# Altium PCB projet_pcb_F103.PCBDOC
Units mil, origin at the board's own origin, x right, y up, seen from the top; angles counter-clockwise.
Board outline 3545 x 2760 mil, 2 copper layers (TopLayer, BottomLayer); 24 components, 25 nets, 112 pads, 13 vias.
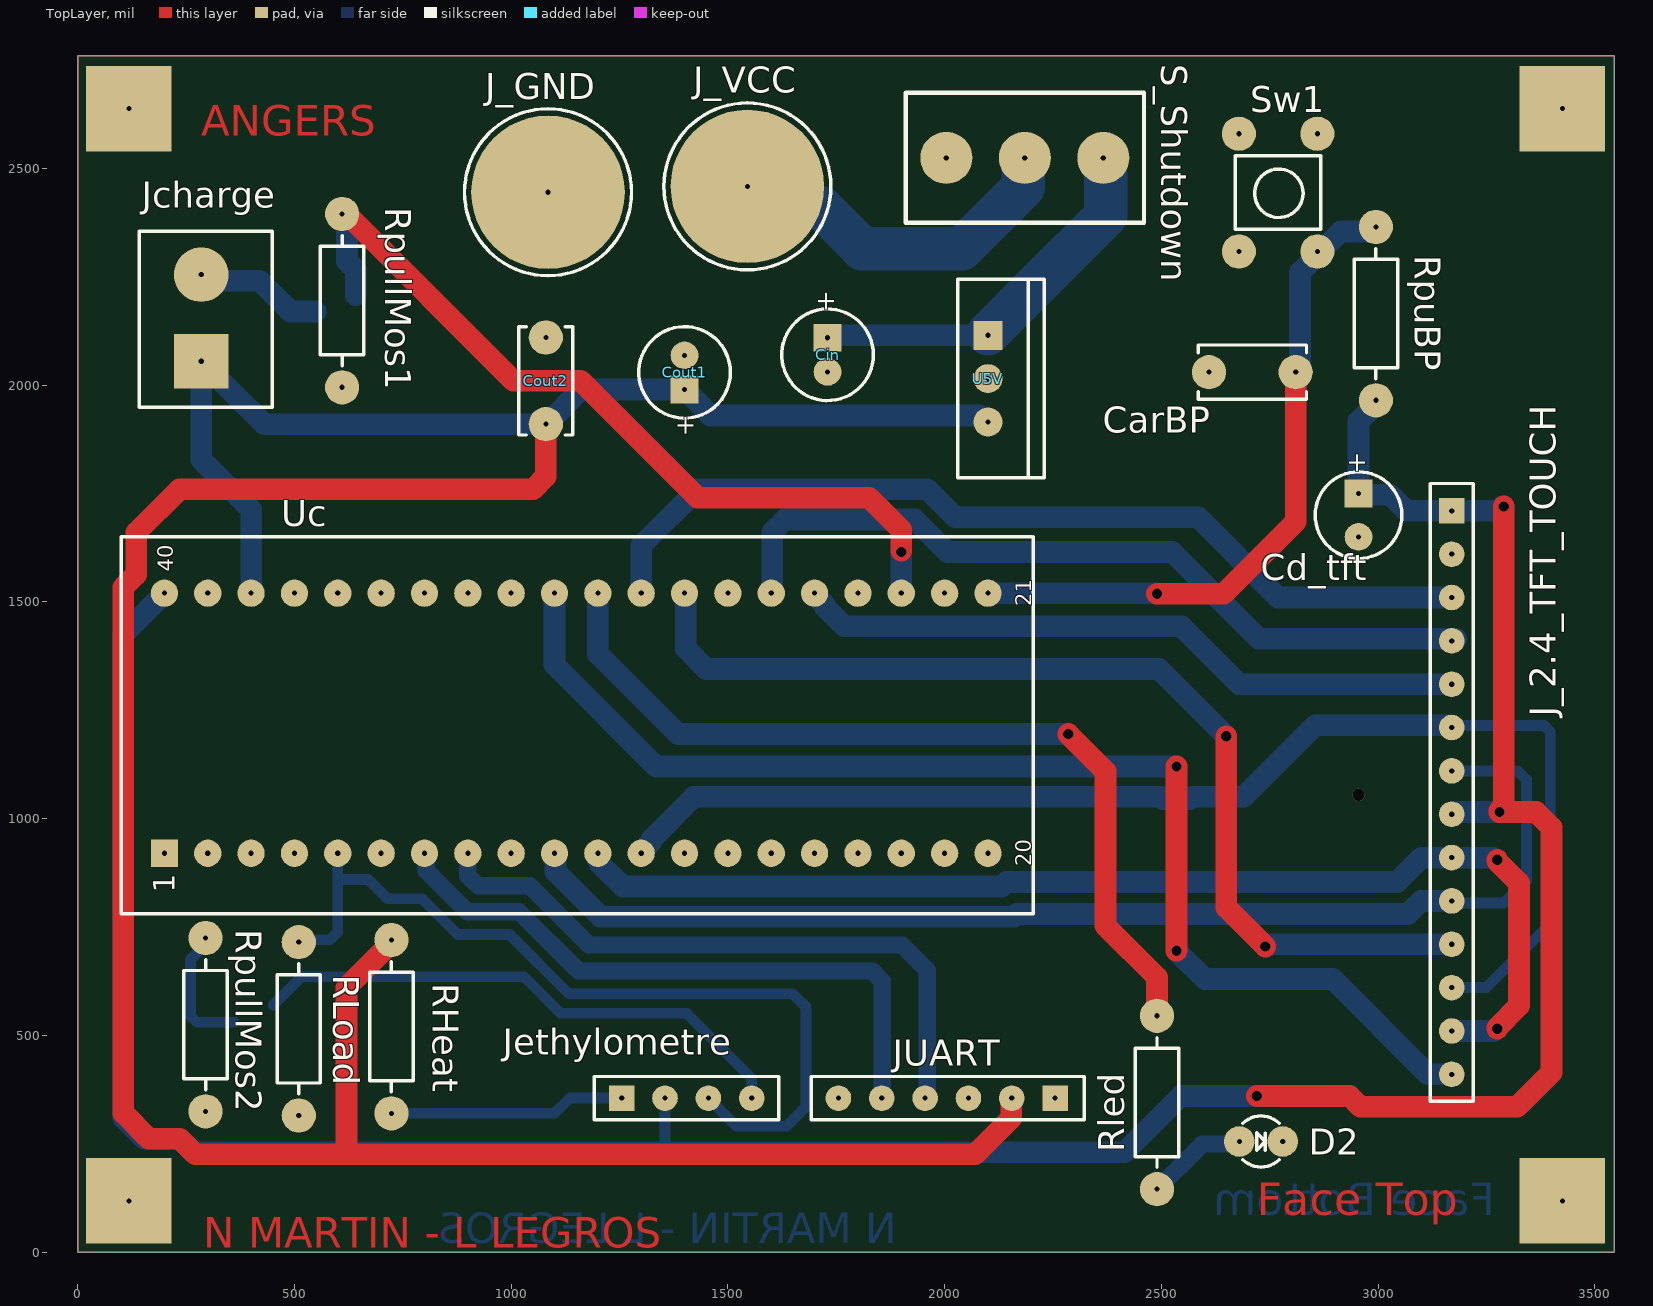
[diagram p0: TopLayer view]
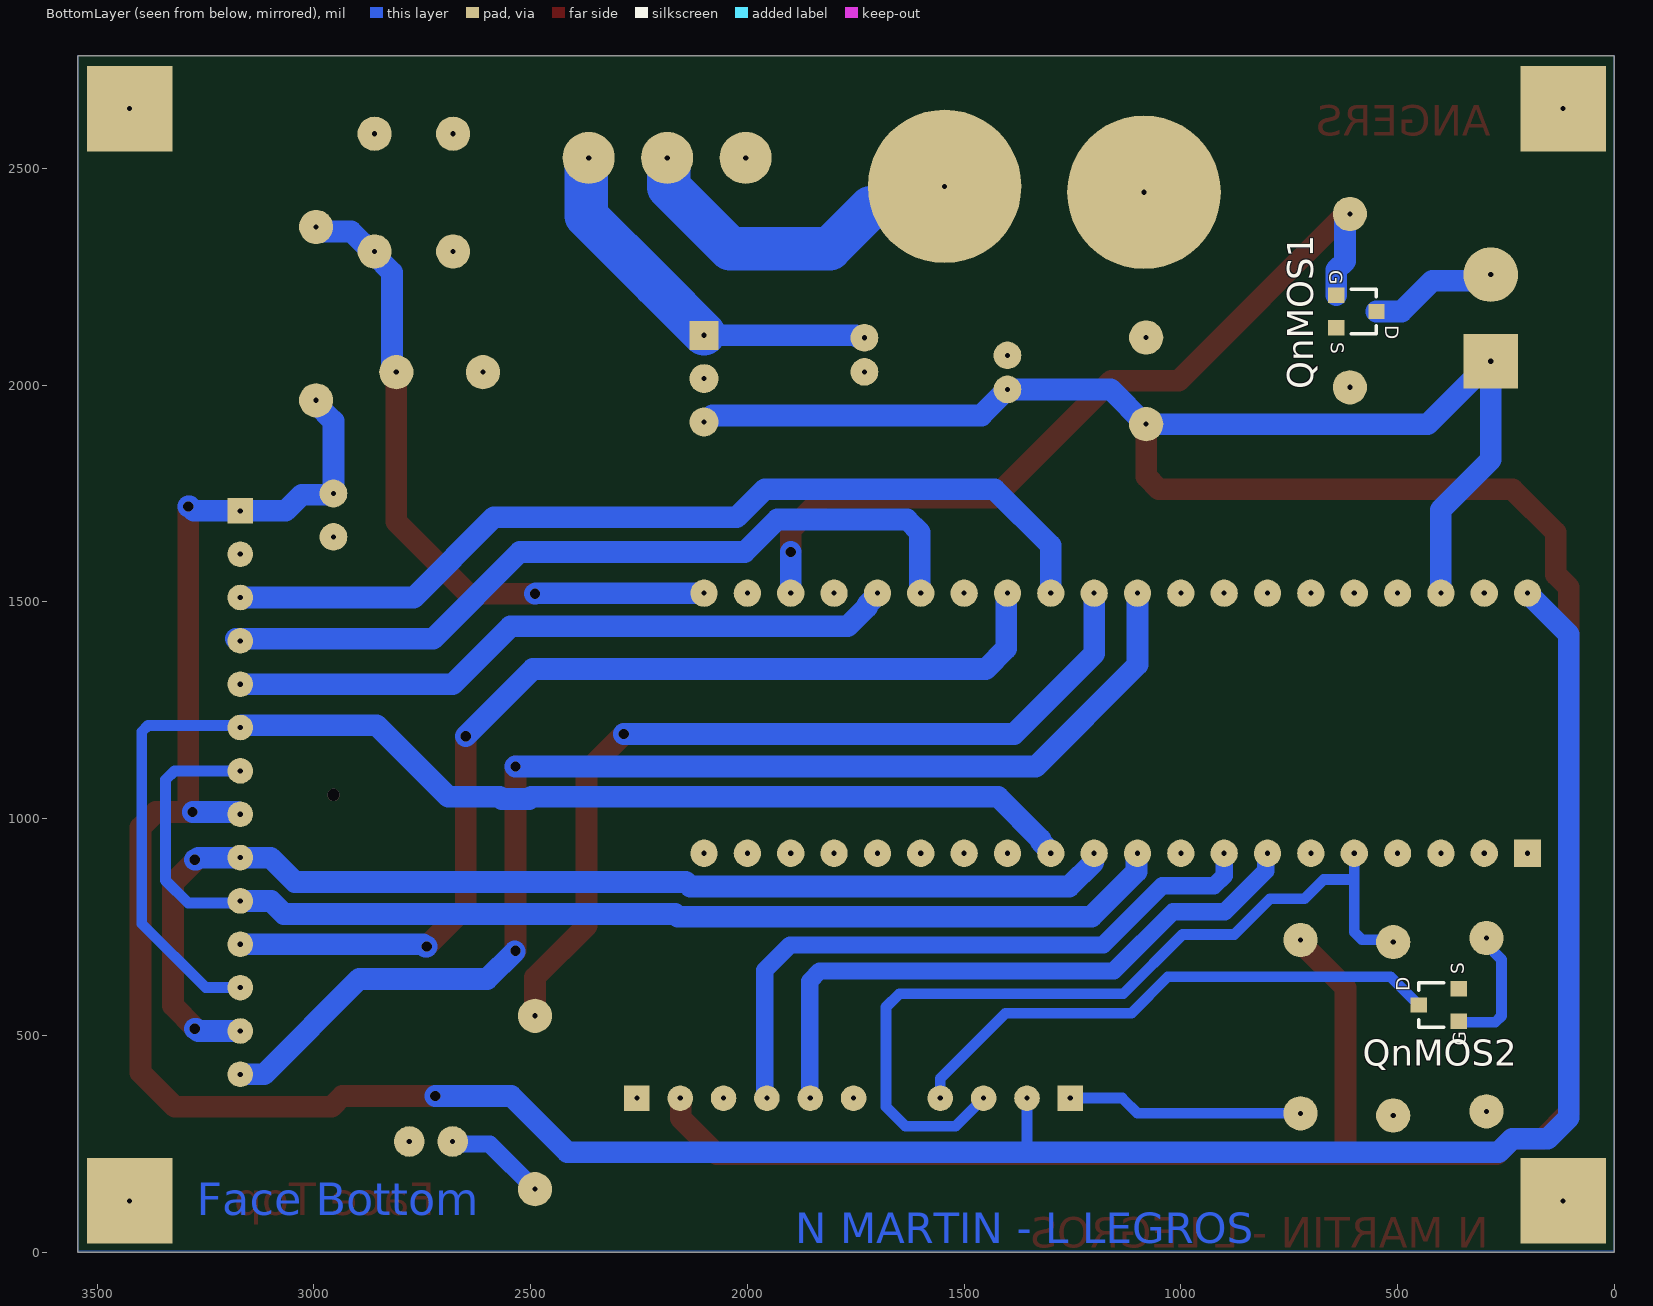
[diagram p1: BottomLayer view, seen from below]

## Layer stack, top to bottom
TopSolder: solder mask 0.4, Solder Resist, Dk 3.5
TopLayer: signal copper 1.4
Dielectric1: core 12.6, FR-4, Dk 4.8
BottomLayer: signal copper 1.4
BottomSolder: solder mask 0.4, Solder Resist, Dk 3.5

## Board outline
0,0 0,2760 3545,2760 3545,0

## Design rules (kind name [scope] priority, off if disabled: settings)
Clearance PowerPlaneClearance [InNamedPolygon('Bot-GND') Or  InNamedPolygon('Top-GND')] p1: gap=40 ignorepadtopadclearanceinfootprint=FALSE except(0: Arc-Hole Track-Hole SMDPad-Hole THPad-Hole Via-Hole Fill-Hole Poly-Hole Region-Hole Text-Hole)
Clearance [All] p2: gap=20 ignorepadtopadclearanceinfootprint=TRUE except(0: Arc-Hole Track-Hole SMDPad-Hole THPad-Hole Via-Hole Fill-Hole Poly-Hole Region-Hole Text-Hole)
FabricationTestPointUsage TestPointUsage [All] p1: valid=0 allowmultiple=FALSE
FabricationTestpoint Testpoint [All] p1: side=3 testpointundercomponent=TRUE minsize=40 maxsize=100 preferedsize=60 minholesize=20 maxholesize=40 preferedholesize=32 testpointgrid=1 allowsidetop=TRUE allowsidebottom=TRUE usegrid=TRUE gridtolerance=0.01
Height [All] p1: minheight=0 maxheight=2000 prefheight=500
HoleSize [All] p1: absolutevalues=TRUE maxlimit=300 minlimit=11.81 maxpercent=80.000 minpercent=20.000
PlaneClearance [All] p1: clearance=40
PlaneConnect [All] p1: planeconnectstyle=Relief reliefexpansion=19.68 reliefentries=4 reliefconductorwidth=40 reliefairgap=19.68
PolygonConnect [All] p1: connectstyle=Relief reliefconductorwidth=40 reliefentries=4 polygonreliefangle="90 Angle" airgapwidth=10
RoutingVias [All] p1: holewidth=23.62 width=60 viastyle="Through Hole" minholewidth=23.62 minwidth=60 maxholewidth=23.62 maxwidth=60
SilkToSolderMaskClearance SilkscreenOverComponentPads [IsPad] p1: minsilkscreentomaskgap=10 clearancetoexposedcopper=TRUE
SolderMaskExpansion [All] p1: expansion=2 istentingtop=FALSE
Width [All] p1: maxlimit=1000 minlimit=20 preferedwidth=40
23 further rules are at their usual default settings.

## Components (designator, comment, footprint, x,y, rotation, side; value= is the part's Value field where it differs from the comment)
CarBP "CONDENSATEUR_CER_RAD_5.08" CONDENSATEUR_CERAMIQUE_RADIAL_5.08 2610,2030 r0 top value=100nF
Cd_tft "10uF" CONDENSATEUR_POLARISE_ELECTROLYTIQUE_RADIAL_2.54/5.08 2955,1750 r270 top
Cin "CONDENSATEUR_POL_ELECTROLY_RAD_2.0/5.08" CONDENSATEUR_POLARISE_ELECTROLYTIQUE_RADIAL_2.0/5.08 1730,2070 r270 top value=10µF/>25V
Cout1 "CONDENSATEUR_POL_ELECTROLY_RAD_2.0/5.08" CONDENSATEUR_POLARISE_ELECTROLYTIQUE_RADIAL_2.0/5.08 1400,2029.37 r90 top value=1µF/>10V
Cout2 "CONDENSATEUR_CER_RAD_5.08" CONDENSATEUR_CERAMIQUE_RADIAL_5.08 1080,2110 r270 top value=100nF
D2 "LED_3MM" LED_3MM 2730,255 r270 top
J_2.4_TFT_TOUCH "BARRETTE_14 CONTACTS_1 RANGEE_FEMELLE_DROITE" BARRETTE_14_F_D 3170,1710 r270 top
J_GND "DOUILLE BANANE 4mm" DOUILLE_BANANE_4mm 1085,2445 r270 top
J_VCC "DOUILLE BANANE 4mm" DOUILLE_BANANE_4mm 1545,2458.48 r270 top
Jcharge "BORNIER2 DROIT A VIS" BORNIER2_A_VIS 285,2055 r90 top
Jethylometre "BARRETTE_4 CONTACTS_1 RANGEE_FEMELLE_DROITE" BARRETTE_4_F_D 1255,355 r0 top
JUART "BARRETTE_6 CONTACTS_1 RANGEE_FEMELLE_DROITE" BARRETTE_6_F_D 2255,355 r180 top
QnMOS1 "TRANSISTOR_MOSFET-N_SOT23_GSD" TRANSISTOR_MOSFET-N_SOT23_GSD 595,2170 r270 bottom
QnMOS2 "TRANSISTOR_MOSFET-N_SOT23_GSD" TRANSISTOR_MOSFET-N_SOT23_GSD 405,570 r90 bottom
RHeat "RESISTANCE_AXIALE_1/4W" RESISTANCE_1/4W 723.73,720 r270 top value=30
Rled "RESISTANCE_AXIALE_1/4W" RESISTANCE_1/4W 2490,545 r270 top value=1K
RLoad "RESISTANCE_AXIALE_1/4W" RESISTANCE_1/4W 510,315 r90 top value=10K
RpuBP "RESISTANCE_AXIALE_1/4W" RESISTANCE_1/4W 2995,1965 r90 top value=10K
RpullMos1 "RESISTANCE_AXIALE_1/4W" RESISTANCE_1/4W 610,1995 r90 top value=10K
RpullMos2 "RESISTANCE_AXIALE_1/4W" RESISTANCE_1/4W 295,324.55 r90 top value=10K
S_Shutdown "INTERRUPTEUR_UNIPOLAIRE_DROIT_A_LEVIER" INTER_UNIPOL_DROIT_LEVIER 2185,2524.44 r90 top
Sw1 "BOUTON_POUSSOIR_MINIATURE_TRAVERSANT" BOUTON_POUSSE_PLAT_6x6 2671.02,2292.6 r0 top
U5V "REGULATEUR_TO220_78XX" REGULATEUR_TO220_78XX 2100,2015 r270 top
Uc "STM32F103C8T6/PCB_DIP40" STM32F103C8T6_DIP40 200,920 r90 top

## Footprints (in the part's own frame and the unit in brackets; to place one, negate y for a bottom-side part, rotate by r counter-clockwise, add the part's x,y. Pads: shape width x height; smd on the part's side, far side on the other; paste and mask are expansions set on the pad)
BARRETTE_4_F_D [mm] "BARRETTE 4 CONTACTS ; 1 RANGEE ; DROITE ; FEMELLE ; ESPACEMENT BROCHES = 2.54 mm"
  rect 1.5x1.5 hole 0.3: 1(0,0)
  round 1.5 hole 0.3: 1(2.54,0) 1(5.08,0) 1(7.62,0)
  silkscreen extent -1.6,-1.27 9.2,1.27, body extent -1.53,-1.21 9.13,1.2, height 8.5
BARRETTE_6_F_D [mm] "BARRETTE 6 CONTACTS ; 1 RANGEE ; DROITE ; FEMELLE ; ESPACEMENT BROCHES = 2.54 mm"
  rect 1.5x1.5 hole 0.3: 1(0,0)
  round 1.5 hole 0.3: 1(2.54,0) 1(5.08,0) 1(7.62,0) 1(10.16,0) 1(12.7,0)
  silkscreen extent -1.7,-1.27 14.3,1.27, body extent -1.57,-1.2 14.17,1.21, height 8.5
BARRETTE_14_F_D [mm] "BARRETTE 14 CONTACTS ; 1 RANGEE ; DROITE ; FEMELLE ; ESPACEMENT BROCHES = 2.54 mm"
  rect 1.5x1.5 hole 0.3: 1(0,0)
  round 1.5 hole 0.3: 1(2.54,0) 1(5.08,0) 1(7.62,0) 1(10.16,0) 1(12.7,0) 1(15.24,0) 1(17.78,0) 1(20.32,0) 1(22.86,0) 1(25.4,0) 1(27.94,0) 1(30.48,0) 1(33.02,0)
  silkscreen extent -1.6,-1.27 34.6,1.27, body extent -1.53,-1.2 34.53,1.21, height 8.5
BORNIER2_A_VIS [mm] "BORNIER 2 PLOTS A VIS ; VERTICAL ; ESPACEMENT BROCHES = 5.08mm"
  rect 3.2x3.2 hole 0.3: 1(0,0)
  round 3.2 hole 0.3: 1(5.08,0)
  silkscreen extent -2.69,-4.15 7.62,3.63, body extent -2.5,-4 7.5,3.5, height 10
BOUTON_POUSSE_PLAT_6x6 [mm] "BOUTON POUSSOIR MINIATURE ON/OFF; BOUTON PLAT/LONG ; ESPACEMENT BROCHES = 7.62mm/5.08mm"
  round 2.007 hole 0.3: 1(0.2,0.4) 1(0.2,7.3) 1(4.8,0.4) 1(4.8,7.3)
  silkscreen extent 0,1.7 5,6, body extent -0.56,-0.03 5.64,7.87, height 7
CONDENSATEUR_CERAMIQUE_RADIAL_5.08 [mil] "CONDENSATEUR TRAVERSANT CERAMIQUE RADIAL ; DIMENSIONS : 3.17mm x 5.08mm"
  round 79 hole 11.81: 1(0,0) 1(200,0)
  silkscreen extent -25,-62 225,62, body extent -11,-43 209,42, height 148
CONDENSATEUR_POLARISE_ELECTROLYTIQUE_RADIAL_2.0/5.08 [mil] "CONDENSATEUR POLARISE ELECTROLYTIQUE RADIAL ; DIAMETRE : 5.08mm ; ESPACEMENT BROCHES : 2mm"
  rect 64x64 / inner round 64 / far side round 64 hole 11.81: 1(-39.37,0)
  round 64 hole 11.81: 1(39.37,0)
  silkscreen extent -106,-105 106,106, body extent -98,-98 98,98, height 433
CONDENSATEUR_POLARISE_ELECTROLYTIQUE_RADIAL_2.54/5.08 [mil] "CONDENSATEUR_POLARISE_ELECTROLYTIQUE_RADIAL ; DIAMETRE : 5.08mm ; ESPACEMENT BROCHES : 2.54mm"
  rect 64x64 / inner round 64 / far side round 64 hole 11.81: 1(0,0)
  round 64 hole 11.81: 1(100,0)
  silkscreen extent -50,-100 150,100, body extent -50,-101 149,98, height 446
DOUILLE_BANANE_4mm [mm] "DOUILLE BANANE ; DIAMETRE PASSAGE CONTACT = 4 mm ; DIAMETRE PERCAGE = 6 mm"
  round 9 hole 0.3: 1(0,0)
  silkscreen extent -4.89,-4.89 4.89,4.89, body extent -5.5,-5.6 5.63,5.53, height 4.79
INTER_UNIPOL_DROIT_LEVIER [mil] "INTERRUPTEUR UNIPOLAIRE DROIT A LEVIER ON/ON ; ESPACEMENTS BROCHES : 5.08mm"
  round 120 hole 11.81: 1(0,181.1) 1(0,0) 1(0,-181.1)
  silkscreen extent -150,-275 150,275, body extent -233,-250 233,250, height 1097
LED_3MM [mm] "LED 3mm; 2 Leads"
  round 1.8 hole 0.3: 1(0,1.27) 1(0,-1.27)
  silkscreen extent -1.5,-1.06 1.5,1.06, body extent -1.64,-1.65 1.65,1.65, height 5.51
REGULATEUR_TO220_78XX [mm] "BOITIER TO220 ; DIMENSIONS : 11.2mm x 4.7mm ; ESPACEMENT BROCHES : 2.54 mm"
  rect 1.7x1.7 hole 0.3: 1(-2.54,0)
  round 1.7 hole 0.3: 1(0,0) 1(2.54,0)
  silkscreen extent -5.83,-1.77 5.8,3.29, body extent -5.61,-1.59 5.61,3.1, height 19.33
RESISTANCE_1/4W [mil] "RESISTANCE 0.25W; DIAMETRE : 2.54mm ; LONGUEUR : 6.35mm ; PAS : 10.16mm"
  round 79 hole 11.81: 1(0,0) 1(400,0)
  silkscreen extent 50,-50 350,50, body extent -15,-47 409,44, height 116
STM32F103C8T6_DIP40 [mm] "STM32F103 monté sur DIP40"
  rect 1.6x1.6 hole 0.3: 1(0,0)
  round 1.6 hole 0.3: 1(0,-2.54) 1(0,-5.08) 1(0,-7.62) 1(0,-10.16) 1(0,-12.7) 1(0,-15.24) 1(0,-17.78) 1(0,-20.32) 1(0,-22.86) 1(0,-25.4) 1(0,-27.94) 1(0,-30.48) 1(0,-33.02) 1(0,-35.56) 1(0,-38.1) 1(0,-40.64) 1(0,-43.18) 1(0,-45.72) 1(0,-48.26) 1(15.24,-22.86) 1(15.24,-20.32) 1(15.24,-17.78) 1(15.24,-15.24) 1(15.24,-12.7) 1(15.24,-10.16) 1(15.24,-7.62) 1(15.24,-5.08) 1(15.24,-2.54) 1(15.24,0) 1(15.24,-48.26) 1(15.24,-45.72) 1(15.24,-43.18) 1(15.24,-40.64) 1(15.24,-38.1) 1(15.24,-35.56) 1(15.24,-33.02) 1(15.24,-30.48) 1(15.24,-27.94) 1(15.24,-25.4)
  silkscreen extent -3.56,-50.92 18.54,2.54, body extent -3.63,-51.04 18.37,6.1, height 20.63
TRANSISTOR_MOSFET-N_SOT23_GSD [mm] "SOT23 ; DIMENSIONS : 3.0mm x 2.5 mm"
  rect 0.9x0.95 smd: 1(-0.95,-1.175) 1(0,1.175) 1(0.95,-1.175)
  silkscreen extent -1.3,-0.3 1.3,1.18, body extent -1.5,-1.57 1.5,1.57, height 1.1

## Part data
CarBP Cout2: "CONDENSATEUR TRAVERSANT CERAMIQUE RADIAL 5.08mm", Type=RADIAL_5.08
Cd_tft: library part Condensateur, "Capacitor", LatestRevisionDate=17-Jul-2002, LatestRevisionNote="Re-released for DXP Platform.", PackageReference=RAD-0.3, Published=8-Jun-2000, Publisher="Altium Limited"
Cin Cout1: "CONDENSATEUR POLARISE ELECTROLYTIQUE RADIAL 2.0/5.08", Type=POL_RAD_2.0/5.08
D2: "LED 3MM - ROUGE/VERTE/JAUNE", Type=LED_3mm
J_GND J_VCC: library part DOUILLE_BANANE_4mm, "DOUILLE BANANE 4 mm", Type=BANANE_4mm
Jcharge: library part "BORNIER2_DROIT_A VIS", "BORNIER 2 PLOTS DROIT A VIS 5.08mm", Type=BORNIER2_D
Jethylometre: "BARRETTE 4 CONTACTS 1 RANGEE FEMELLE DROITE", Type=F_D_4
JUART: "BARRETTE 6 CONTACTS 1 RANGEE FEMELLE DROITE", Type=F_D_6
QnMOS1 QnMOS2: "TRANSISTOR MOSFET CANAL N BOITIER SOT23_GSD", Package=SOT23, Type=IRFML8244TRPBF
RHeat Rled RLoad RpuBP RpullMos1 RpullMos2: "RESISTANCE TRAVERSANTE AXIALE 1/4W", Type=1/4W
Sw1: "BOUTON POUSSOIR MINIATURE TRAVERSANT ON/OFF", Type=B_POUSS_MINI_T
U5V: "REGULATEUR DE TENSION POSITIVE 78XX BOITIER TO220", Package=(TO220), Type=7805
Uc: "MICROCONTROLEUR 32 BITS - 72MHz - 34 I/O - 64 KO : FLASH - 20KO RAM - 10 CANAUX A/D 12 BITS - DIP40 - UART, SPI, I2C, USB, CAN", Package=DIP40, Type=STM32F103C8T6
J_2.4_TFT_TOUCH: Type=F_D_14
S_Shutdown: Type=UNIPOL_D_L

## Free pads (board coordinates)
  rect 196.85x196.85 hole 11.81: 1(118.11,118.11) 1(118.11,2637.8) 1(3425.2,118.11) 1(3425.2,2637.8)

## Via types
v1: diameter 23.62, hole 23.62, TopLayer to BottomLayer, 12 vias
v2: diameter 28, hole 28, TopLayer to BottomLayer, 1 vias

## Nets (pads, with @x,y where several pads share a name; then routed paths per layer and width w, separated by ;. In a path a pad name is that pad's centre, name@x,y a point inside that pad or via, vN(x,y) a via of type N, cw(c..) or ccw(c..) an arc to the next point about the centre after c; other vN are vias at no path point)
+3V3_BP: Cd_tft.1@2955,1750 J_2.4_TFT_TOUCH.1@3170,1010 J_2.4_TFT_TOUCH.1@3170,1710 Jethylometre.1@1355,355 RpuBP.1@2995,1965 Uc.1@200,1520 | length 6913.3
  TopLayer w50: v1(2720,360) 2934.52,360 2959.05,335.47 3321.35,335.47 3400,414.13 3400,980 3364.89,1015.11 v1(3279.89,1015.11) 3279.89,1017.82 3290,1027.93 v1(3290,1720)
  BottomLayer w25: 1353.41,230 1355,231.59 Jethylometre.1@1355,355
  BottomLayer w50: Uc.1@200,1520 105,1425 105,310 153.46,261.54 235.18,261.54 266.71,230 1353.41,230 2415,230 2545,360 v1(2720,360) ; RpuBP.1@2998.29,1961.71 2995,1965 2995,1957.15 2955,1917.15 2955,1750 2957.68,1747.32 3028.15,1747.32 3065.47,1710 3170,1710 3277.29,1710 3287.29,1720 v1(3290,1720) ; J_2.4_TFT_TOUCH.1@3170,1010 3172.45,1010 3177.56,1015.11 v1(3279.89,1015.11)
+5V: Cout1.1@1400,1990 Cout2.1@1080,1910 Jcharge.1@285,2055 JUART.1@2155,355 RHeat.1@723.73,720 U5V.1@2100,1915 Uc.1@400,1520 | length 7693.5
  TopLayer w50: RHeat.1@723.73,713.73 620,610 620,225.5 ; Cout2.1@1080,1910 1080,1789.29 1050.71,1760 235,1760 135,1660 135,1563.18 105,1533.18 105,320.82 164.29,261.54 235.18,261.54 271.21,225.5 620,225.5 ; JUART.1@2155,355 2153.59,353.59 2153.59,308.59 2122.3,277.3 2070.5,225.5 620,225.5
  BottomLayer w50: Uc.1@400,1520 400,1712.76 285,1827.76 285,2055 430,1910 1080,1910 1081.93,1910 1161.93,1990 1400,1990 1460,1930 2080.42,1930 2095.42,1915 U5V.1@2100,1915
GND: CarBP.1@2610,2030 Cd_tft.1@2955,1650 Cin.1@1730,2030.63 Cout1.1@1400,2068.74 Cout2.1@1080,2110 D2.1@2780,255 J_2.4_TFT_TOUCH.1@3170,1610 J_GND.1 JUART.1@2055,355 pad.1@3425.2,118.11 pad.1@3425.2,2637.8 QnMOS1.1@641.26,2132.6 QnMOS2.1@358.74,607.4 RLoad.1@510,315 RpullMos1.1@610,1995 RpullMos2.1@295,324.55 Sw1.1@2678.9,2308.35 U5V.1@2100,2015 Uc.1@300,1520 Uc.1@2000,920 Uc.1@2100,920
  other v2: 2955,1055
"MOS2 Sensor": Jethylometre.1@1555,355 QnMOS2.1@451.26,570 | length 1273.2
  BottomLayer w25: QnMOS2.1@451.26,570 516.26,635 1030.11,635 1114.11,551 1404.35,551 1555,400.36 Jethylometre.1@1555,355
NetD2_1: D2.1@2680,255 Rled.1@2490,145 | length 235.6
  BottomLayer w40: Rled.1@2490,145 2594.09,249.09 2674.09,249.09 D2.1@2680,255
NetJ_VCC_1: J_VCC.1 S_Shutdown.1@2185,2524.44 | length 799.3
  BottomLayer w100: J_VCC.1@1583.2,2490 1583.2,2489.1 1662.49,2409.82 1715.18,2409.82 1810,2315 2040,2315 2181.17,2456.17 2181.17,2520.61 S_Shutdown.1@2185,2524.44
NetJcharge_2: Jcharge.1@285,2255 QnMOS1.1@548.74,2170 | length 298.9
  BottomLayer w50: Jcharge.1@285,2255 299.54,2240.46 420.1,2240.46 490.56,2170 QnMOS1.1@548.74,2170
NetJethylometre_1: Jethylometre.1@1255,355 RHeat.1@723.73,320 | length 545.8
  BottomLayer w25: RHeat.1@723.73,320 1100,320 1135,355 Jethylometre.1@1255,355
PA0_AN0: Jethylometre.1@1455,355 RLoad.1@510,715 Uc.1@600,920 | length 1985.8
  BottomLayer w25: RLoad.1@510,710 520.33,720.33 582.01,720.33 600,738.33 600,859.16 ; Uc.1@600,920 600,859.16 ; Jethylometre.1@1455,355 1520,290 1635,290 1680,335 1680,565 1649,596 1132.75,596 996.25,732.5 876.83,732.5 794.33,815 714.5,815 670.33,859.16 600,859.16
PA2_U2TX: JUART.1@1855,355 Uc.1@800,920 | length 1469.9
  BottomLayer w40: Uc.1@800,920 804.4,915.6 804.4,879.18 898.58,785 1018,785 1154.5,648.5 1832.92,648.5 1856.35,625.07 JUART.1@1856.35,355
PA3_U2RX: JUART.1@1955,355 Uc.1@900,920 | length 1497
  BottomLayer w40: Uc.1@900,920 900,868.43 923.43,845 1042.85,845 1179.35,708.5 1901.5,708.5 1960,650 JUART.1@1960,355
PA5_SPI-SCK: J_2.4_TFT_TOUCH.1@3170,810 J_2.4_TFT_TOUCH.1@3170,1110 Uc.1@1100,920 | length 2778.5
  BottomLayer w25: J_2.4_TFT_TOUCH.1@3170,810 3175,805 3290,805 3342.39,857.39 3342.39,1089.53 3321.92,1110 J_2.4_TFT_TOUCH.1@3170,1110
  BottomLayer w50: Uc.1@1100,920 1102.49,917.51 1102.49,877.29 1206.27,773.5 2160.68,773.5 2167.18,780 3069.13,780 3099.13,810 J_2.4_TFT_TOUCH.1@3170,810
PA6_SPI-MISO: J_2.4_TFT_TOUCH.1@3170,510 J_2.4_TFT_TOUCH.1@3170,910 Uc.1@1200,920 | length 2685.7
  TopLayer w50: v1(3274.78,515) 3274.78,517.71 3325,567.93 3325,851.85 3274.78,902.07 v1(3274.78,904.78)
  BottomLayer w50: Uc.1@1200,920 1202.49,917.51 1202.49,898.3 1257.28,843.5 2131.69,843.5 2141.92,853.74 3043.88,853.74 3100.14,910 3170,910 3266.85,910 3272.07,904.78 v1(3274.78,904.78) ; J_2.4_TFT_TOUCH.1@3170,510 3267.07,510 3272.07,515 v1(3274.78,515)
PA7_SPI-MOSI: J_2.4_TFT_TOUCH.1@3170,610 J_2.4_TFT_TOUCH.1@3170,1210 Uc.1@1300,920 | length 2961.5
  BottomLayer w25: J_2.4_TFT_TOUCH.1@3170,610 3249.78,610 3397.28,757.5 3397.28,1200.36 3382.63,1215 J_2.4_TFT_TOUCH.1@3170,1215
  BottomLayer w50: Uc.1@1300,920 1300,923.52 1323.5,947.02 1323.5,951.69 1421.82,1050 2498.93,1050 2503.93,1045 2566.07,1045 2571.07,1050 2690,1050 2855,1215 J_2.4_TFT_TOUCH.1@3165.82,1215
PA8_TFT-DC: J_2.4_TFT_TOUCH.1@3170,1310 Uc.1@1700,1520 | length 1561.8
  BottomLayer w50: Uc.1@1700,1520 1700,1516.48 1723.5,1492.98 1723.5,1488.31 1768.31,1443.5 2546.5,1443.5 2680,1310 J_2.4_TFT_TOUCH.1@3170,1310
PA9_TFT-RESET: J_2.4_TFT_TOUCH.1@3170,1410 Uc.1@1600,1520 | length 1845.3
  BottomLayer w50: Uc.1@1600,1520 1602.49,1522.49 1602.49,1660.71 1631.78,1690 1931.07,1690 2006.07,1615 2525,1615 2725,1415 J_2.4_TFT_TOUCH.1@3180,1415
PA11_TOUCH-CS: J_2.4_TFT_TOUCH.1@3170,710 Uc.1@1400,1520 | length 2414.3
  TopLayer w50: v1(2650,1190) 2650,795 v1(2740,705)
  BottomLayer w50: Uc.1@1400,1520 1402.49,1517.51 1402.49,1392.51 1450,1345 2495,1345 v1(2650,1190) ; v1(2740,705) 2742.71,705 2747.71,710 J_2.4_TFT_TOUCH.1@3170,710
PA12_TFT-CS: J_2.4_TFT_TOUCH.1@3170,1510 Uc.1@1300,1520 | length 2137.4
  BottomLayer w50: Uc.1@1300,1520 1300,1630 1430,1760 1960.06,1760 2025.06,1695 2585,1695 2770,1510 J_2.4_TFT_TOUCH.1@3170,1510
PA15_LED: Rled.1@2490,545 Uc.1@1200,1520 | length 2036.5
  TopLayer w50: v1(2285,1195) 2371.05,1108.95 2371.05,752.89 2490,633.93 Rled.1@2490,545
  BottomLayer w50: Uc.1@1200,1520 1200,1380 1385,1195 v1(2285,1195)
PB3_TOUCH-IRQ: J_2.4_TFT_TOUCH.1@3170,410 Uc.1@1100,1520 | length 2872.9
  TopLayer w50: v1(2535,695) v1(2535,1120)
  BottomLayer w50: Uc.1@1100,1520 1100,1355 1335,1120 v1(2535,1120) ; v1@2536.75,693.25 2600,630 2895,630 3115,410 J_2.4_TFT_TOUCH.1@3170,410
PB12_BUTTON: CarBP.1@2810,2030 RpuBP.1@2995,2365 Sw1.1@2860,2308.35 Uc.1@2100,1520 | length 1575.9
  TopLayer w50: v1(2490,1518.5) 2643.5,1518.5 2810,1685 CarBP.1@2810,2030
  BottomLayer w50: Uc.1@2100,1520 2488.5,1520 v1(2490,1518.5) ; CarBP.1@2820,2030 2820,2260.5 2860,2300.5 2860,2308.35 2867.85,2308.35 2913.95,2354.45 2989.45,2354.45 RpuBP.1@2995,2360
PB13_NMOS1: QnMOS2.1@358.74,532.6 RpullMos2.1@295,724.55 | length 301.6
  BottomLayer w25: RpullMos2.1@295,724.55 295,709.94 260,674.94 260,544.64 274.64,530 QnMOS2.1@361.11,530
PB13_NMOS2: Uc.1@2000,1520
PB14_NMOS1: QnMOS1.1@641.26,2207.4 RpullMos1.1@610,2395 Uc.1@1900,1520 | length 1942.2
  TopLayer w50: RpullMos1.1@615.55,2399.45 1005,2010 1160,2010 1430,1740 1826.15,1740 1900,1666.15 v1@1900,1617.71
  BottomLayer w50: RpullMos1.1@604.45,2400.55 RpullMos1.1@610,2395 ; RpullMos1.1@615.55,2399.45 621.1,2393.9 621.1,2286.06 641.26,2265.89 QnMOS1.1@641.26,2207.4 ; Uc.1@1900,1520 v1(1900,1615)
VCC: Cin.1@1730,2109.37 S_Shutdown.1@2366.1,2524.44 U5V.1@2100,2115 | length 888.2
  BottomLayer w50: Cin.1@1735,2109.37 1737.68,2112.05 1747.58,2112.05 1750.53,2115 U5V.1@2100,2115
  BottomLayer w100: U5V.1@2100,2118.46 2213.41,2231.87 2371.78,2390.24 2371.78,2513.35 2366.1,2519.02 S_Shutdown.1@2366.1,2524.44
pads on no net: JUART.1@1755,355 JUART.1@2255,355 S_Shutdown.1@2003.9,2524.44 Sw1.1@2678.9,2580 Sw1.1@2860,2580 Uc.1@200,920 Uc.1@300,920 Uc.1@400,920 Uc.1@500,920 Uc.1@500,1520 Uc.1@600,1520 Uc.1@700,920 Uc.1@700,1520 Uc.1@800,1520 Uc.1@900,1520 Uc.1@1000,920 Uc.1@1000,1520 Uc.1@1400,920 Uc.1@1500,920 Uc.1@1500,1520 Uc.1@1600,920 Uc.1@1700,920 Uc.1@1800,920 Uc.1@1800,1520 Uc.1@1900,920

## Polygon pours and split planes (outlines as drawn)
GND on TopLayer "Top-GND" (solid, remove dead copper, shelved, pour order 4): 2.5,2760 3545,2760 3545,0 2.5,0
GND on BottomLayer "Bot-GND" (solid, remove dead copper, shelved, pour order 5): 0,2760 3545,2760 3545,2.5 0,2.5

## Other copper
TopLayer:
  text "ANGERS" at 285,2575 h70.87
  text "Face Top" at 2720,85 h75
  text "N MARTIN - L LEGROS" at 290,10 h70.87
BottomLayer:
  text "Face Bottom" at 3270,85 h75
  text "N MARTIN - L LEGROS" at 1890,20 h70.87

## Silkscreen, mask and mechanical layers (free items; w line width, h text height)
TopOverlay:
  text "Consignes / Conseils :" at 5815,1405 h393.7
  text "1- désactivez la fonctionnalité \"online DRC\"" at 6300,1040 h393.7
  text "Tools->Preferences -> décocher 'online DRC'" at 6775,655 h393.7
  text "Tools->Reset error markers" at 6790,230 h393.7
  text "2- Déplacez les plans de masse en dehors de la carte" at 6295,-195 h393.7
  text "3- Si elles sont visibles / gênantes : masquez les couches mécaniques 3D" at 6270,-720 h393.7
  text "Bouton-droit sur les onglets (en bas) Mechanical1, 13 -> Hide" at 6820,-1165 h393.7
  text "4- mettre vos noms à la place de \"nom du binôme\"" at 6265,-1710 h393.7
  text "5- Par défaut, la taille de piste minimale est définie à 20 mils.  /     Si cela s'avère absolutement nécessaire (passage entre deux broches espacées de 2,54mm...), vous pouvez modifier ce réglage dans /     -> Design -> Rules -> Routing -> Width -> Width" at 6245,-3360 h393.7
  text "6- Par défaut, la clearance (espace minimale entre deux objets dont le net diffère) est reglée à 20 mils. /     Si cela s'avère nécessaire (petit composant CMS / volonté assumée d'une règle moins stricte), /      vous pouvez descendre à 10mils : /     -> Design -> Rules -> Electrical -> Clearance-> Clearance" at 6255,-4935 h393.7
Mechanical1:
  the board outline again, w20

## Text inside footprints (layer, text, board x,y; h text height)
Cd_tft: TopOverlay "+" at 2933.35,1846.85 h45 r270
Cin: TopOverlay "+" at 1708.35,2218.82 h45 r270
Cout1: TopOverlay "+" at 1421.65,1880.55 h45 r90
QnMOS1: BottomOverlay "G" at 657.99,2264.49 h31.5 r90; BottomOverlay "S" at 654.06,2099.13 h31.5 r90; BottomOverlay "D" at 528.07,2138.5 h31.5 r90
QnMOS2: BottomOverlay "G" at 342.01,475.51 h31.5 r270; BottomOverlay "S" at 345.94,640.87 h31.5 r270; BottomOverlay "D" at 471.93,601.5 h31.5 r270
Uc: TopOverlay "1" at 223.62,829.45 h50 r90; TopOverlay "20" at 2200,890 h35.43 r90; TopOverlay "40" at 220,1570 h35.43 r90; TopOverlay "21" at 2200,1490 h35.43 r90